# EAGLE board CHRMN-PROT-SHIELD-2up (EAGLE 7.3.0)
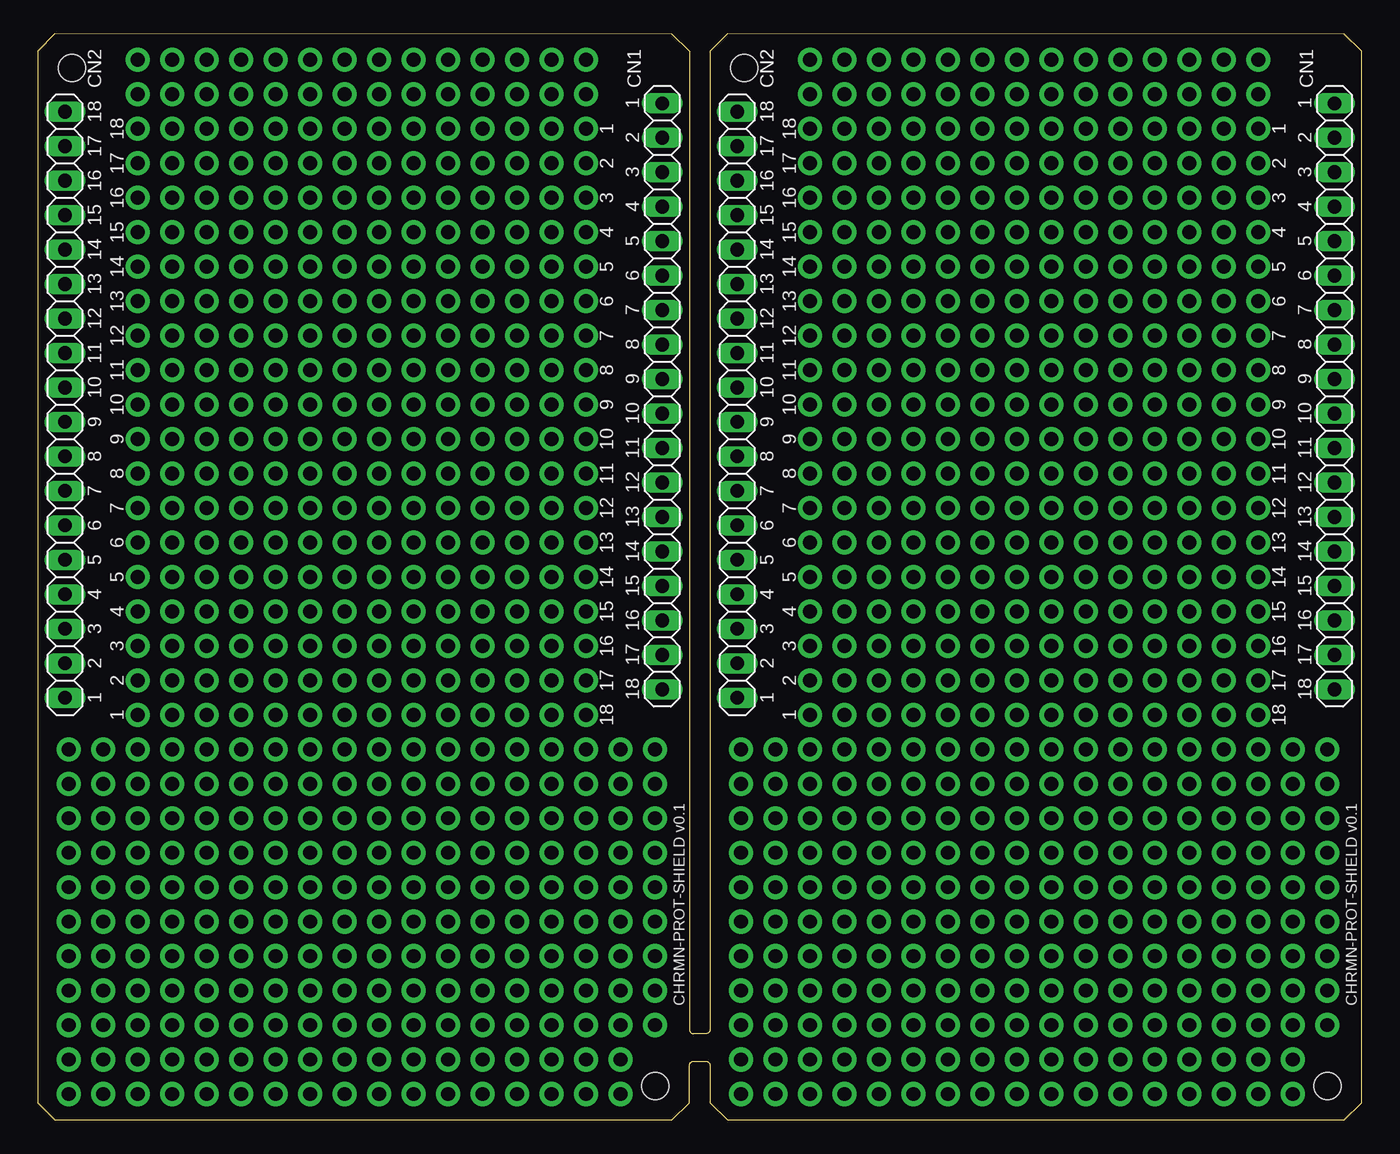
[diagram p0: board, top side]
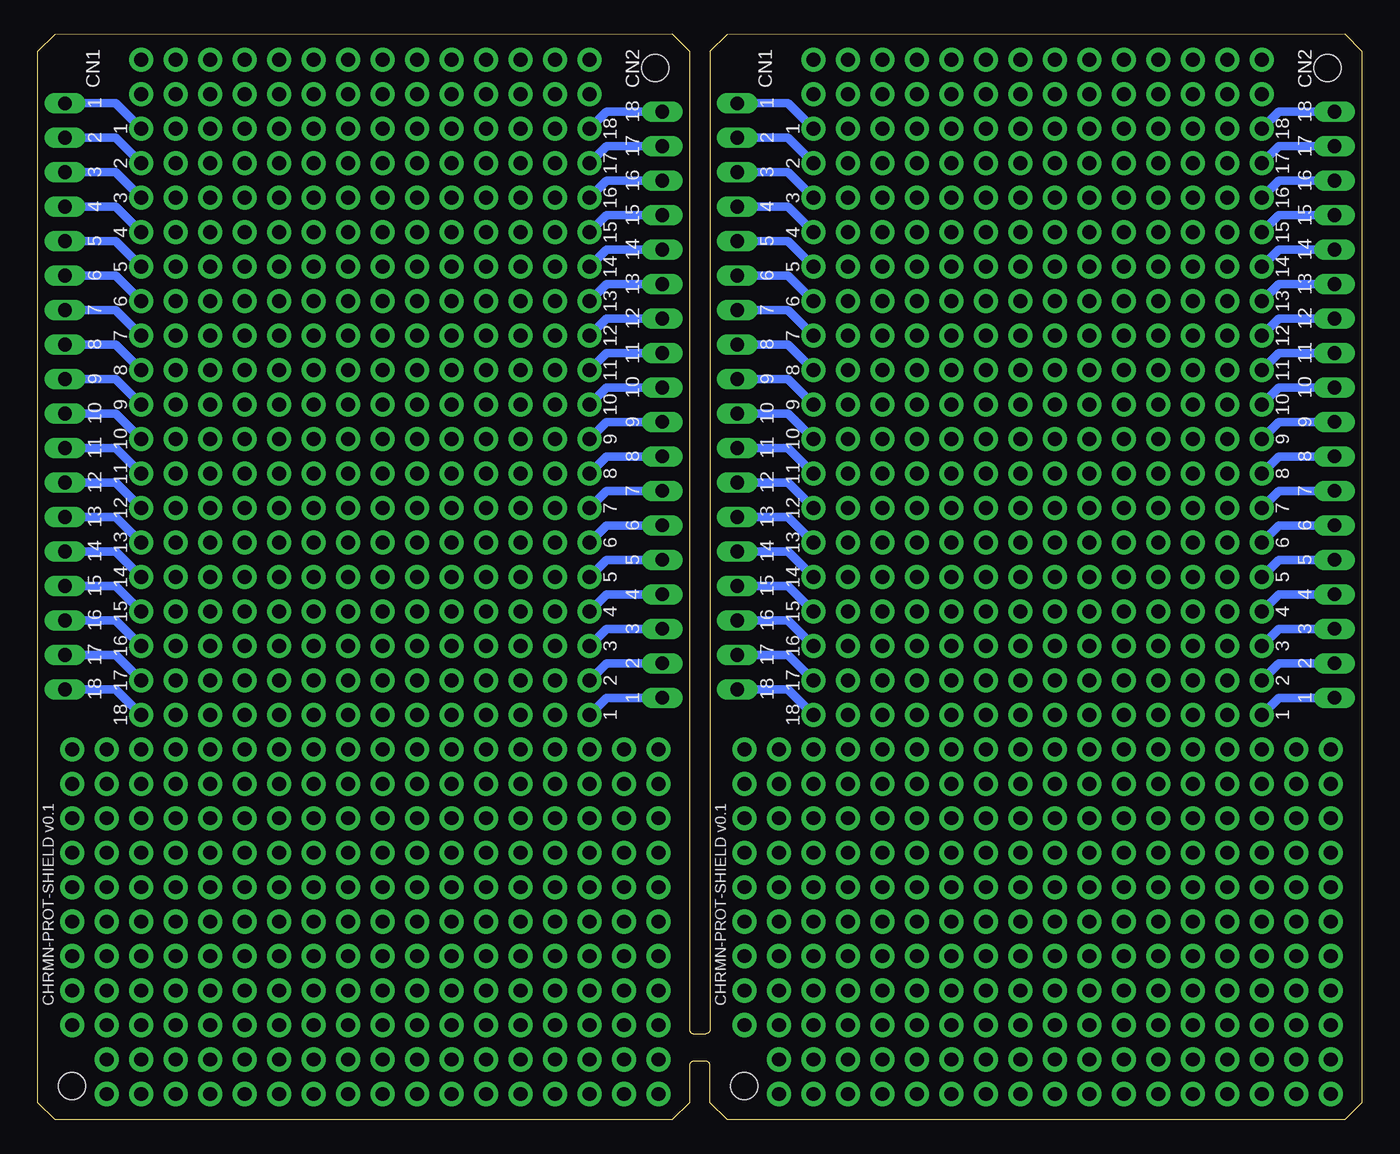
[diagram p1: board, bottom side, seen from below]

Size 97.54 x 80.01 mm. Coordinates in mm from the lower left corner, seen from the top.
Outline: 0,78.74 0,1.27 1.27,0 46.74,0 48.01,1.27 48.01,4 arc-90 48.32,4.32 49.21,4.32 arc-90 49.53,4 49.53,1.27 50.8,0 96.27,0 97.54,1.27 97.54,78.73 96.27,80 50.8,80.01 49.53,78.74 49.53,6.67 arc-90 49.21,6.35 48.32,6.35 arc-90 48.01,6.67 48.01,78.73 46.74,80 1.27,80.01 0,78.74
Copper layers (1*16): Top 0.035mm / dielectric 1.5mm / Bottom 0.035mm
Design rules "default": minimum track width 10mil, minimum drill 24mil, track to track 8mil, track to pad 8mil, pad to pad 8mil, via to via 8mil, smd to smd 8mil, copper to edge 40mil, drill to drill 8mil, minimum pad ring 10mil, minimum via ring 8mil, stop-mask expansion 4mil, vias tented up to drill 0mil, thermal gap 10mil
Net classes: 0 default: width 0.61 mm, drill 0.203 mm, clearance 0.203 mm
Holes 2 mm at 2.51,77.5 45.51,2.5 52.04,77.5 95.04,2.5

## Footprints (pad centres in the part's own frame; a part is rotated, then mirrored left to right if it is on the bottom)
1X18 = drill 1.016 long: 1 -21.59,0; 2 -19.05,0; 3 -16.51,0; 4 -13.97,0; 5 -11.43,0; 6 -8.89,0; 7 -6.35,0; 8 -3.81,0; 9 -1.27,0; 10 1.27,0; 11 3.81,0; 12 6.35,0; 13 8.89,0; 14 11.43,0; 15 13.97,0; 16 16.51,0; 17 19.05,0; 18 21.59,0
N-PHEAD-1_14 = drill 1.016 pad 1.778: 1 -16.51,0; 2 -13.97,0; 3 -11.43,0; 4 -8.89,0; 5 -6.35,0; 6 -3.81,0; 7 -1.27,0; 8 1.27,0; 9 3.81,0; 10 6.35,0; 11 8.89,0; 12 11.43,0; 13 13.97,0; 14 16.51,0
N-PHEAD-1_18 = drill 1.016 pad 1.778: 1 -16.51,0; 2 -13.97,0; 3 -11.43,0; 4 -8.89,0; 5 -6.35,0; 6 -3.81,0; 7 -1.27,0; 8 1.27,0; 9 3.81,0; 10 6.35,0; 11 8.89,0; 12 11.43,0; 13 13.97,0; 14 16.51,0; 15 -19.05,0; 16 -21.59,0; 17 19.05,0; 18 21.59,0
N-PHEAD-1_17 = drill 1.016 pad 1.778: 1 -15.24,0; 2 -12.7,0; 3 -10.16,0; 4 -7.62,0; 5 -5.08,0; 6 -2.54,0; 7 0,0; 8 2.54,0; 9 5.08,0; 10 7.62,0; 11 10.16,0; 12 12.7,0; 13 15.24,0; 14 17.78,0; 15 -17.78,0; 16 -20.32,0; 17 20.32,0

## Placement (x,y rotation side)
CN1  [1X18]  46.01,53.3 270 top
CN2  [1X18]  2.01,52.7 90 top
CN3  [1X18]  95.54,53.3 270 top
CN4  [1X18]  51.54,52.7 90 top
JP1  [N-PHEAD-1_14]  23.88,78.11 180 top
JP2  [N-PHEAD-1_14]  23.88,75.56 180 top
JP3  [N-PHEAD-1_14]  23.88,73.03 180 top
JP4  [N-PHEAD-1_14]  23.88,70.48 180 top
JP5  [N-PHEAD-1_14]  23.88,67.94 180 top
JP6  [N-PHEAD-1_14]  23.88,65.41 180 top
JP7  [N-PHEAD-1_14]  23.88,62.87 180 top
JP8  [N-PHEAD-1_14]  23.88,60.33 180 top
JP9  [N-PHEAD-1_14]  23.88,57.78 180 top
JP10  [N-PHEAD-1_14]  23.88,55.24 180 top
JP11  [N-PHEAD-1_14]  23.88,52.7 180 top
JP12  [N-PHEAD-1_14]  23.88,50.16 180 top
JP13  [N-PHEAD-1_14]  23.88,47.62 180 top
JP14  [N-PHEAD-1_14]  23.88,45.09 180 top
JP15  [N-PHEAD-1_14]  23.88,42.55 180 top
JP16  [N-PHEAD-1_14]  23.88,40.01 180 top
JP17  [N-PHEAD-1_14]  23.88,37.47 180 top
JP18  [N-PHEAD-1_14]  23.88,34.92 180 top
JP19  [N-PHEAD-1_14]  23.88,32.38 180 top
JP20  [N-PHEAD-1_14]  23.88,29.84 180 top
JP21  [N-PHEAD-1_18]  23.88,27.3 180 top
JP22  [N-PHEAD-1_18]  23.88,24.77 180 top
JP23  [N-PHEAD-1_18]  23.88,22.23 180 top
JP24  [N-PHEAD-1_18]  23.88,19.68 180 top
JP25  [N-PHEAD-1_18]  23.88,17.14 180 top
JP26  [N-PHEAD-1_18]  23.88,14.61 180 top
JP27  [N-PHEAD-1_18]  23.88,12.06 180 top
JP28  [N-PHEAD-1_18]  23.88,9.53 180 top
JP29  [N-PHEAD-1_18]  23.88,6.99 180 top
JP30  [N-PHEAD-1_17]  22.61,4.45 180 top
JP31  [N-PHEAD-1_17]  22.61,1.91 180 top
JP32  [N-PHEAD-1_14]  73.41,78.11 180 top
JP33  [N-PHEAD-1_14]  73.41,75.56 180 top
JP34  [N-PHEAD-1_14]  73.41,73.03 180 top
JP35  [N-PHEAD-1_14]  73.41,70.48 180 top
JP36  [N-PHEAD-1_14]  73.41,67.94 180 top
JP37  [N-PHEAD-1_14]  73.41,65.41 180 top
JP38  [N-PHEAD-1_14]  73.41,62.87 180 top
JP39  [N-PHEAD-1_14]  73.41,60.33 180 top
JP40  [N-PHEAD-1_14]  73.41,57.78 180 top
JP41  [N-PHEAD-1_14]  73.41,55.24 180 top
JP42  [N-PHEAD-1_14]  73.41,52.7 180 top
JP43  [N-PHEAD-1_14]  73.41,50.16 180 top
JP44  [N-PHEAD-1_14]  73.41,47.62 180 top
JP45  [N-PHEAD-1_14]  73.41,45.09 180 top
JP46  [N-PHEAD-1_14]  73.41,42.55 180 top
JP47  [N-PHEAD-1_14]  73.41,40.01 180 top
JP48  [N-PHEAD-1_14]  73.41,37.47 180 top
JP49  [N-PHEAD-1_14]  73.41,34.92 180 top
JP50  [N-PHEAD-1_14]  73.41,32.38 180 top
JP51  [N-PHEAD-1_14]  73.41,29.84 180 top
JP52  [N-PHEAD-1_18]  73.41,27.3 180 top
JP53  [N-PHEAD-1_18]  73.41,24.77 180 top
JP54  [N-PHEAD-1_18]  73.41,22.23 180 top
JP55  [N-PHEAD-1_18]  73.41,19.68 180 top
JP56  [N-PHEAD-1_18]  73.41,17.14 180 top
JP57  [N-PHEAD-1_18]  73.41,14.61 180 top
JP58  [N-PHEAD-1_18]  73.41,12.06 180 top
JP59  [N-PHEAD-1_18]  73.41,9.53 180 top
JP60  [N-PHEAD-1_18]  73.41,6.99 180 top
JP61  [N-PHEAD-1_17]  72.14,4.45 180 top
JP62  [N-PHEAD-1_17]  72.14,1.91 180 top

## Library data of the parts
CN1-CN4 = pinhead
JP1-JP62 = 0my

## Nets
N$1: CN2.18 JP3.14
N$2: CN2.17 JP4.14
N$3: CN2.16 JP5.14
N$4: CN2.15 JP6.14
N$5: CN2.14 JP7.14
N$6: CN2.13 JP8.14
N$7: CN2.12 JP9.14
N$8: CN2.11 JP10.14
N$9: CN2.10 JP11.14
N$10: CN2.9 JP12.14
N$11: CN2.8 JP13.14
N$12: CN2.7 JP14.14
N$13: CN2.6 JP15.14
N$14: CN2.5 JP16.14
N$15: CN2.4 JP17.14
N$16: CN2.3 JP18.14
N$17: CN2.2 JP19.14
N$18: CN2.1 JP20.14
N$19: CN1.1 JP3.1
N$20: CN1.2 JP4.1
N$21: CN1.3 JP5.1
N$22: CN1.4 JP6.1
N$23: CN1.5 JP7.1
N$24: CN1.6 JP8.1
N$25: CN1.7 JP9.1
N$26: CN1.8 JP10.1
N$27: CN1.9 JP11.1
N$28: CN1.10 JP12.1
N$29: CN1.11 JP13.1
N$30: CN1.12 JP14.1
N$31: CN1.13 JP15.1
N$32: CN1.14 JP16.1
N$33: CN1.15 JP17.1
N$34: CN1.16 JP18.1
N$35: CN1.17 JP19.1
N$36: CN1.18 JP20.1
N$37: CN4.18 JP34.14
N$38: CN4.17 JP35.14
N$39: CN4.16 JP36.14
N$40: CN4.15 JP37.14
N$41: CN4.14 JP38.14
N$42: CN4.13 JP39.14
N$43: CN4.12 JP40.14
N$44: CN4.11 JP41.14
N$45: CN4.10 JP42.14
N$46: CN4.9 JP43.14
N$47: CN4.8 JP44.14
N$48: CN4.7 JP45.14
N$49: CN4.6 JP46.14
N$50: CN4.5 JP47.14
N$51: CN4.4 JP48.14
N$52: CN4.3 JP49.14
N$53: CN4.2 JP50.14
N$54: CN4.1 JP51.14
N$55: CN3.1 JP34.1
N$56: CN3.2 JP35.1
N$57: CN3.3 JP36.1
N$58: CN3.4 JP37.1
N$59: CN3.5 JP38.1
N$60: CN3.6 JP39.1
N$61: CN3.7 JP40.1
N$62: CN3.8 JP41.1
N$63: CN3.9 JP42.1
N$64: CN3.10 JP43.1
N$65: CN3.11 JP44.1
N$66: CN3.12 JP45.1
N$67: CN3.13 JP46.1
N$68: CN3.14 JP47.1
N$69: CN3.15 JP48.1
N$70: CN3.16 JP49.1
N$71: CN3.17 JP50.1
N$72: CN3.18 JP51.1

## Tracks (layer width: path | path; a pad name or v marks a point on that pad's centre or on a via)
N$1
  Bottom 0.61: CN2.18 4.82,74.28 4.83,74.3 6.1,74.3 JP3.14
N$2
  Bottom 0.61: CN2.17 6.11,71.75 JP4.14
N$3
  Bottom 0.61: CN2.16 6.11,69.2 JP5.14
N$4
  Bottom 0.61: CN2.15 6.11,66.67 JP6.14
N$5
  Bottom 0.61: CN2.14 6.11,64.12 JP7.14
N$6
  Bottom 0.61: CN2.13 6.11,61.59 JP8.14
N$7
  Bottom 0.61: CN2.12 6.11,59.05 JP9.14
N$8
  Bottom 0.61: CN2.11 6.11,56.51 JP10.14
N$9
  Bottom 0.61: CN2.10 6.11,53.97 JP11.14
N$10
  Bottom 0.61: CN2.9 6.11,51.42 JP12.14
N$11
  Bottom 0.61: CN2.8 6.11,48.88 JP13.14
N$12
  Bottom 0.61: CN2.7 6.11,46.34 JP14.14
N$13
  Bottom 0.61: CN2.6 6.11,43.8 JP15.14
N$14
  Bottom 0.61: CN2.5 6.11,41.27 JP16.14
N$15
  Bottom 0.61: CN2.4 6.11,38.73 JP17.14
N$16
  Bottom 0.61: CN2.3 6.11,36.19 JP18.14
N$17
  Bottom 0.61: CN2.2 6.11,33.65 JP19.14
N$18
  Bottom 0.61: CN2.1 6.11,31.11 JP20.14
N$19
  Bottom 0.61: CN1.1 42.26,74.89 JP3.1
N$20
  Bottom 0.61: CN1.2 42.26,72.36 JP4.1
N$21
  Bottom 0.61: CN1.3 42.26,69.81 JP5.1
N$22
  Bottom 0.61: CN1.4 42.26,67.28 JP6.1
N$23
  Bottom 0.61: CN1.5 42.26,64.73 JP7.1
N$24
  Bottom 0.61: CN1.6 42.26,62.2 JP8.1
N$25
  Bottom 0.61: CN1.7 42.26,59.66 JP9.1
N$26
  Bottom 0.61: CN1.8 42.26,57.12 JP10.1
N$27
  Bottom 0.61: CN1.9 42.26,54.58 JP11.1
N$28
  Bottom 0.61: CN1.10 42.26,52.03 JP12.1
N$29
  Bottom 0.61: CN1.11 42.26,49.49 JP13.1
N$30
  Bottom 0.61: CN1.12 42.26,46.95 JP14.1
N$31
  Bottom 0.61: CN1.13 42.26,44.41 JP15.1
N$32
  Bottom 0.61: CN1.14 42.26,41.88 JP16.1
N$33
  Bottom 0.61: CN1.15 42.26,39.34 JP17.1
N$34
  Bottom 0.61: CN1.16 42.26,36.8 JP18.1
N$35
  Bottom 0.61: CN1.17 42.26,34.26 JP19.1
N$36
  Bottom 0.61: CN1.18 42.26,31.71 JP20.1
N$37
  Bottom 0.61: CN4.18 54.35,74.28 54.36,74.3 55.63,74.3 JP34.14
N$38
  Bottom 0.61: CN4.17 55.64,71.75 JP35.14
N$39
  Bottom 0.61: CN4.16 55.64,69.2 JP36.14
N$40
  Bottom 0.61: CN4.15 55.64,66.67 JP37.14
N$41
  Bottom 0.61: CN4.14 55.64,64.12 JP38.14
N$42
  Bottom 0.61: CN4.13 55.64,61.59 JP39.14
N$43
  Bottom 0.61: CN4.12 55.64,59.05 JP40.14
N$44
  Bottom 0.61: CN4.11 55.64,56.51 JP41.14
N$45
  Bottom 0.61: CN4.10 55.64,53.97 JP42.14
N$46
  Bottom 0.61: CN4.9 55.64,51.42 JP43.14
N$47
  Bottom 0.61: CN4.8 55.64,48.88 JP44.14
N$48
  Bottom 0.61: CN4.7 55.64,46.34 JP45.14
N$49
  Bottom 0.61: CN4.6 55.64,43.8 JP46.14
N$50
  Bottom 0.61: CN4.5 55.64,41.27 JP47.14
N$51
  Bottom 0.61: CN4.4 55.64,38.73 JP48.14
N$52
  Bottom 0.61: CN4.3 55.64,36.19 JP49.14
N$53
  Bottom 0.61: CN4.2 55.64,33.65 JP50.14
N$54
  Bottom 0.61: CN4.1 55.64,31.11 JP51.14
N$55
  Bottom 0.61: CN3.1 91.79,74.89 JP34.1
N$56
  Bottom 0.61: CN3.2 91.79,72.36 JP35.1
N$57
  Bottom 0.61: CN3.3 91.79,69.81 JP36.1
N$58
  Bottom 0.61: CN3.4 91.79,67.28 JP37.1
N$59
  Bottom 0.61: CN3.5 91.79,64.73 JP38.1
N$60
  Bottom 0.61: CN3.6 91.79,62.2 JP39.1
N$61
  Bottom 0.61: CN3.7 91.79,59.66 JP40.1
N$62
  Bottom 0.61: CN3.8 91.79,57.12 JP41.1
N$63
  Bottom 0.61: CN3.9 91.79,54.58 JP42.1
N$64
  Bottom 0.61: CN3.10 91.79,52.03 JP43.1
N$65
  Bottom 0.61: CN3.11 91.79,49.49 JP44.1
N$66
  Bottom 0.61: CN3.12 91.79,46.95 JP45.1
N$67
  Bottom 0.61: CN3.13 91.79,44.41 JP46.1
N$68
  Bottom 0.61: CN3.14 91.79,41.88 JP47.1
N$69
  Bottom 0.61: CN3.15 91.79,39.34 JP48.1
N$70
  Bottom 0.61: CN3.16 91.79,36.8 JP49.1
N$71
  Bottom 0.61: CN3.17 91.79,34.26 JP50.1
N$72
  Bottom 0.61: CN3.18 91.79,31.71 JP51.1

## Text on the board
tNames: CN2 | CN1 | CN2 | CN1 | 1 | 1 | 18 | 18 | 18 | 1 | 18 | 1 | 17 | 2 | 17 | 2 | 17 | 2 | 3 | 17 | 2 | 3 | 16 | 16 | 16 | 3 | 16 | 3 | 15 | 4 | 15 | 4 | 15 | 4 | 5 | 15 | 4 | 5 | 14 | 14 | 14 | 5 | 14 | 5 | 13 | 6 | 13 | 6 | 13 | 6 | 7 | 13 | 6 | 7 | 12 | 12 | 12 | 7 | 12 | 7 | 11 | 8 | 11 | 8 | 11 | 8 | 9 | 11 | 8 | 9 | 10 | 10 | 10 | 9 | 10 | 9 | 10 | 10 | 9 | 9 | 9 | 10 | 11 | 9 | 10 | 11 | 8 | 8 | 8 | 11 | 8 | 11 | 12 | 12 | 7 | 7 | 7 | 12 | 7 | 12 | 6 | 13 | 6 | 13 | 6 | 13 | 6 | 13 | 14 | 14 | 5 | 5 | 5 | 14 | 5 | 14 | 4 | 15 | 4 | 15 | 4 | 15 | 16 | 4 | 15 | 16 | 3 | 3 | 3 | 16 | 3 | 16 | 2 | 17 | 2 | 17 | 2 | 17 | 18 | 2 | 17 | 18 | 1 | 1 | 1 | 18 | 1 | 18 | CHRMN-PROT-SHIELD v0.1 | CHRMN-PROT-SHIELD v0.1
bNames: CN2 | CN1 | CN2 | CN1 | 1 | 1 | 18 | 18 | 18 | 1 | 18 | 1 | 17 | 2 | 17 | 2 | 17 | 2 | 3 | 17 | 2 | 3 | 16 | 16 | 16 | 3 | 16 | 3 | 15 | 4 | 15 | 4 | 15 | 4 | 5 | 15 | 4 | 5 | 14 | 14 | 14 | 5 | 14 | 5 | 13 | 6 | 13 | 6 | 13 | 6 | 7 | 13 | 6 | 7 | 12 | 12 | 12 | 7 | 12 | 7 | 11 | 8 | 11 | 8 | 11 | 8 | 9 | 11 | 8 | 9 | 10 | 10 | 10 | 9 | 10 | 9 | 10 | 10 | 9 | 9 | 9 | 10 | 11 | 9 | 10 | 11 | 8 | 8 | 8 | 11 | 8 | 11 | 12 | 12 | 7 | 7 | 7 | 12 | 7 | 12 | 6 | 13 | 6 | 13 | 6 | 13 | 6 | 13 | 14 | 14 | 5 | 5 | 5 | 14 | 5 | 14 | 4 | 15 | 4 | 15 | 4 | 15 | 16 | 4 | 15 | 16 | 3 | 3 | 3 | 16 | 3 | 16 | 2 | 17 | 2 | 17 | 2 | 17 | 18 | 2 | 17 | 18 | 1 | 1 | 1 | 18 | 1 | 18 | CHRMN-PROT-SHIELD v0.1 | CHRMN-PROT-SHIELD v0.1